# EAGLE board probe_circuit v34 (EAGLE 9.7.0)
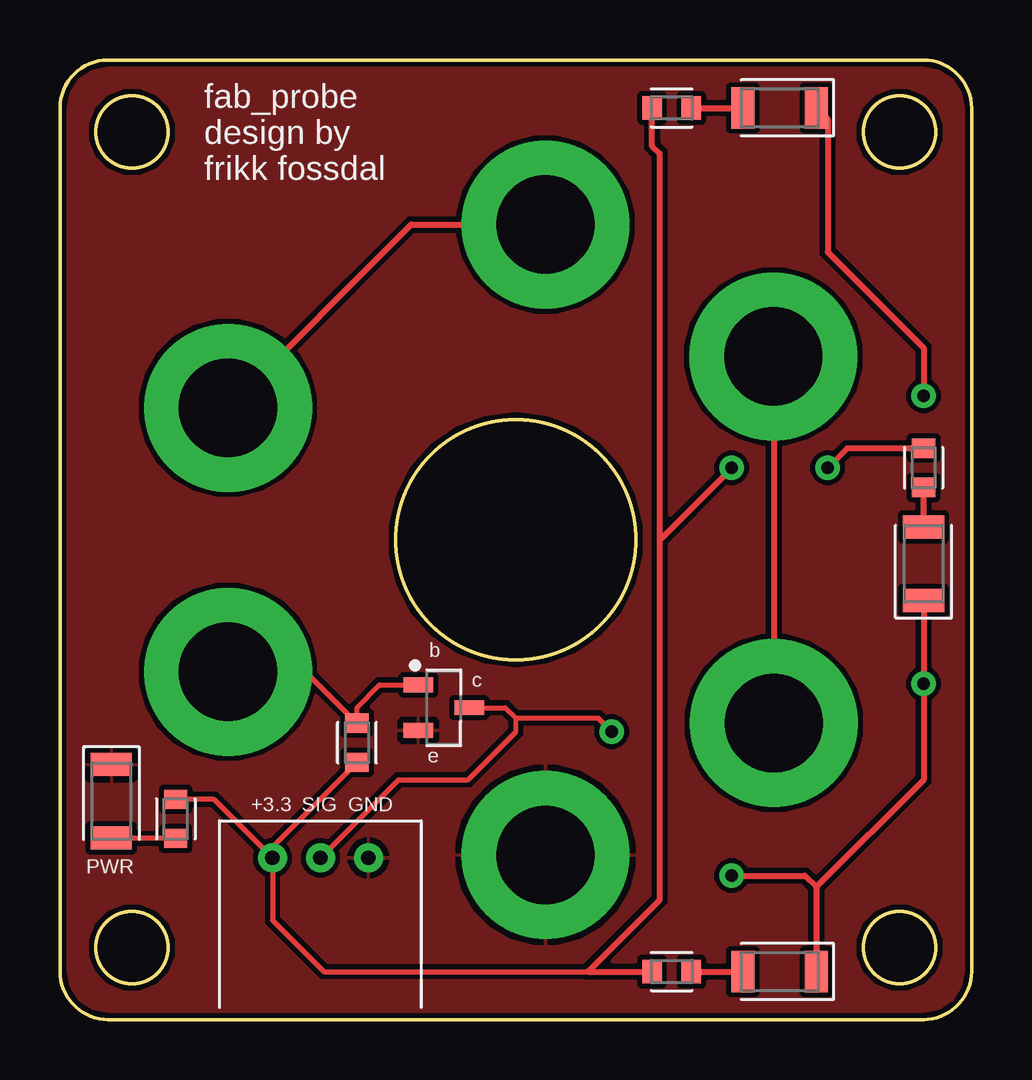
[diagram p0: board, top side]
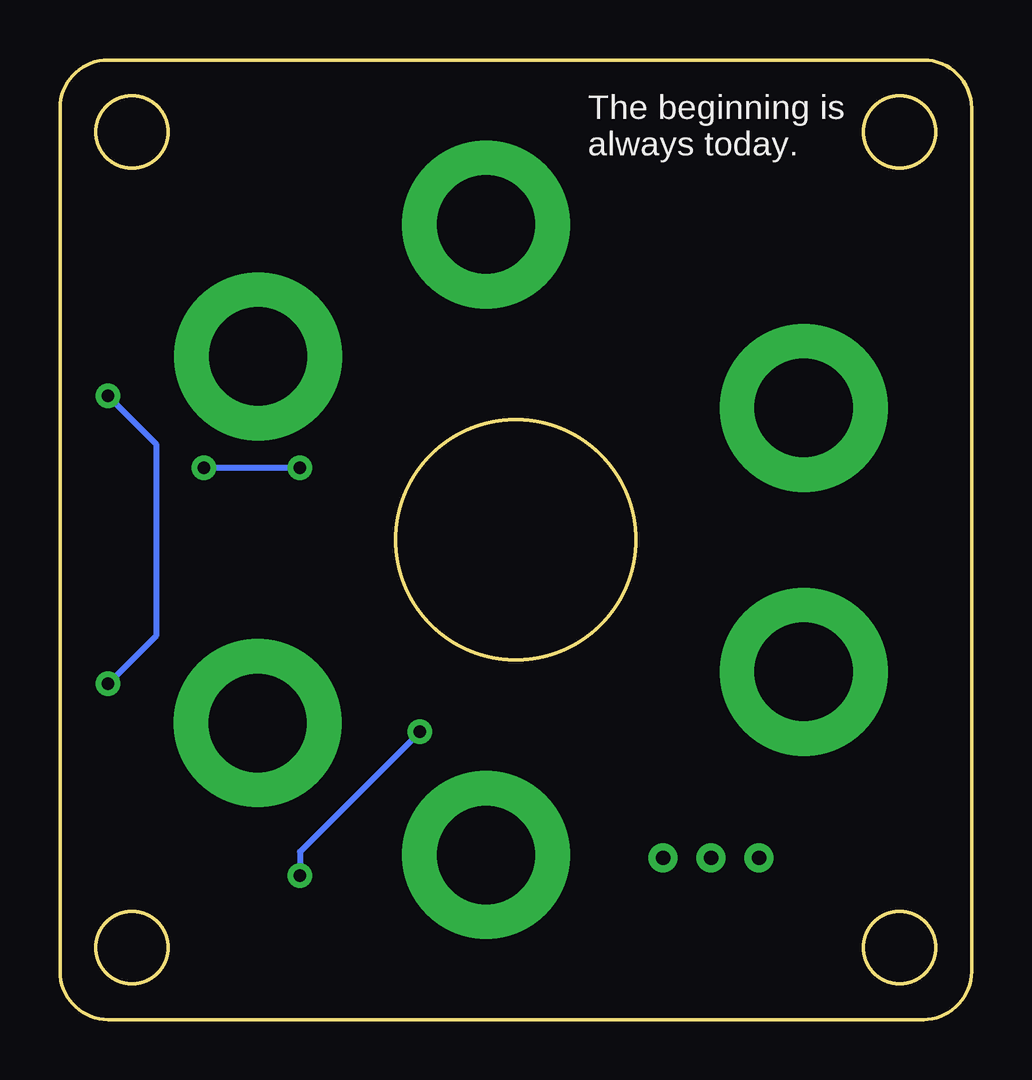
[diagram p1: board, bottom side, seen from below]

Size 38 x 40 mm. Coordinates in mm from the lower left corner, seen from the top.
Outline: 0,38 0,2 arc90 2,0 36,0 arc90 38,2 38,38 arc90 36,40 2,40 arc90 0,38
Outline: circle at 35,3 radius 1.5
Outline: circle at 19,20 radius 5
Outline: circle at 35,37 radius 1.5
Outline: circle at 3,3 radius 1.5
Outline: circle at 3,37 radius 1.5
Copper layers (1*16): Top 0.035mm / dielectric 1.5mm / Bottom 0.035mm
Design rules "SparkFun": minimum track width 8mil, minimum drill 20mil, track to track 8mil, track to pad 8mil, pad to pad 8mil, via to via 8mil, smd to smd 8mil, copper to edge 8mil, drill to drill 8mil, minimum pad ring 12mil, minimum via ring 10mil, stop-mask expansion 4mil, vias tented up to drill 20mil, thermal gap 10mil

## Footprints (pad centres in the part's own frame; a part is rotated, then mirrored left to right if it is on the bottom)
4MM_HOLE = drill 4.1 pad 7: P$1 0,0
LEDC3216X75N_FLAT-R = smd 0.962 x 1.712: A 1.525,0; C -1.525,0
SOT95P237X112-3N = smd 1.224 x 0.625: 1 -1.064,0.95; 2 -1.064,-0.95; 3 1.064,0
RESC1608X60 = smd 0.799 x 0.974: 1 -0.815,0; 2 0.815,0
LEDC3216X75N_FLAT-B = smd 0.962 x 1.712: A 1.525,0; C -1.525,0
JST_2MM_3PIN_ANG = drill 0.6: 1 -2,0; 2 0,0; 3 2,0

## Placement (x,y rotation side)
F0  4MM_HOLE  [4MM_HOLE]  7,14.5 0 top
F1  4MM_HOLE  [4MM_HOLE]  7,25.5 0 top
F2  4MM_HOLE  [4MM_HOLE]  20.24,33.14 0 top
F3  4MM_HOLE  [4MM_HOLE]  29.74,27.64 0 top
F4  4MM_HOLE  [4MM_HOLE]  29.76,12.36 0 top
F5  4MM_HOLE  [4MM_HOLE]  20.24,6.86 0 top
PWR  LED_RED  [LEDC3216X75N_FLAT-R]  2.14,9.1 270 top
Q2  NPN  [SOT95P237X112-3N]  16,13 0 top
R1  100  [RESC1608X60]  25.5,2 180 top
R2  100  [RESC1608X60]  25.5,38 180 top
R3  100  [RESC1608X60]  4.82,8.36 90 top
R4  5000  [RESC1608X60]  12.38,11.54 270 top
R5  100  [RESC1608X60]  36,23 90 top
TO0  LED_BLUE  [LEDC3216X75N_FLAT-B]  36,19 90 top
TO1  LED_BLUE  [LEDC3216X75N_FLAT-B]  30,2 180 top
TO2  LED_BLUE  [LEDC3216X75N_FLAT-B]  30,38 180 top
U$1  JST_2MM_3PIN_ANG  [JST_2MM_3PIN_ANG]  10.86,6.74 0 top

## Library data of the parts
F0 F1-F5 U$1 = FRES_ICs
PWR = LED; CATEGORY: LED; COLOR: RED; DESCRIPTION: CHIP LED FLAT; SUB-CATEGORY: CHIP; TYPE: FLAT_TOP
Q2 = f_transistors; CATEGORY: Transistor; SUB-CATEGORY: BJT; TYPE: NPN
R1-R5 = Resistor; CATEGORY: Resistor; SUB-CATEGORY: Fixed
TO0 TO1 TO2 = LED; CATEGORY: LED; COLOR: BLUE; DESCRIPTION: CHIP LED FLAT; SUB-CATEGORY: CHIP; TYPE: FLAT_TOP

## Nets
+3.3V: R1.2 R2.2 R3.2 R4.2 R5.2 U$1.1
GND: F5.P$1 PWR.C Q2.2 U$1.3
N$1: PWR.A R3.1
N$2: F1.P$1 F2.P$1
N$3: R5.1 TO0.A
N$4: F3.P$1 F4.P$1
N$6: R1.1 TO1.A
N$8: R2.1 TO2.A
SIG: Q2.3 TO0.C TO1.C TO2.C U$1.2
SW_H: F0.P$1 Q2.1 R4.1

## Tracks (layer width: path | path; a pad name or v marks a point on that pad's centre or on a via)
+3.3V  (via drill 0.51)
  Top 0.203: U$1.1 6.42,9.18 R3.2 | U$1.1 8.86,4.14 11,2 22,2 | U$1.1 8.86,7.2 R4.2
  Top 0.254: R1.2 22,2 25,5 25,20 | v28,23 25,20 | v32,23 32.81,23.82 R5.2 | 25,20 25,36.1 24.68,36.41 R2.2
  Bottom 0.254: v28,23 v32,23
GND
  pour Top: -4,46 41,46 41,-3 -4,-3
N$1
  Top 0.203: R3.1 2.17,7.55 PWR.A
N$2
  Top 0.254: F1.P$1 14.64,33.14 F2.P$1
N$3
  Top 0.254: TO0.A R5.1
N$4
  Top 0.254: F3.P$1 29.76,27.62 F4.P$1
N$6
  Top 0.254: R1.1 TO1.A
N$8
  Top 0.254: R2.1 TO2.A
SIG  (via drill 0.51)
  Top 0.203: 19,12.57 22.43,12.57 v23,12 | U$1.2 14.12,10 17,10 19,12 19,12.57 | Q2.3 18.57,13 19,12.57
  Top 0.254: TO2.C 32,37.52 32,32 36,28 v36,26 | 31.52,5.53 36,10 v36,14 TO0.C | 31.52,5.53 TO1.C | v28,6 31.05,6 31.52,5.53
  Bottom 0.254: v36,26 34,24 34,16 v36,14 | v23,12 28,7 v28,6
SW_H
  Top 0.203: F0.P$1 10.23,14.5 R4.1 12.38,13 13.33,13.95 Q2.1

## Text on the board
tPlace: fab_probe / design by / frikk fossdal | b | c | e | +3.3 | SIG | GND | PWR
bPlace: The beginning is / always today.